# Altium PCB Motor_Board.PcbDoc
Units mil, origin at the board's own origin, x right, y up, seen from the top; angles counter-clockwise.
Board outline 5486 x 3957 mil, 2 copper layers (Top Layer, Bottom Layer); 121 components, 86 nets, 397 pads, 128 vias.
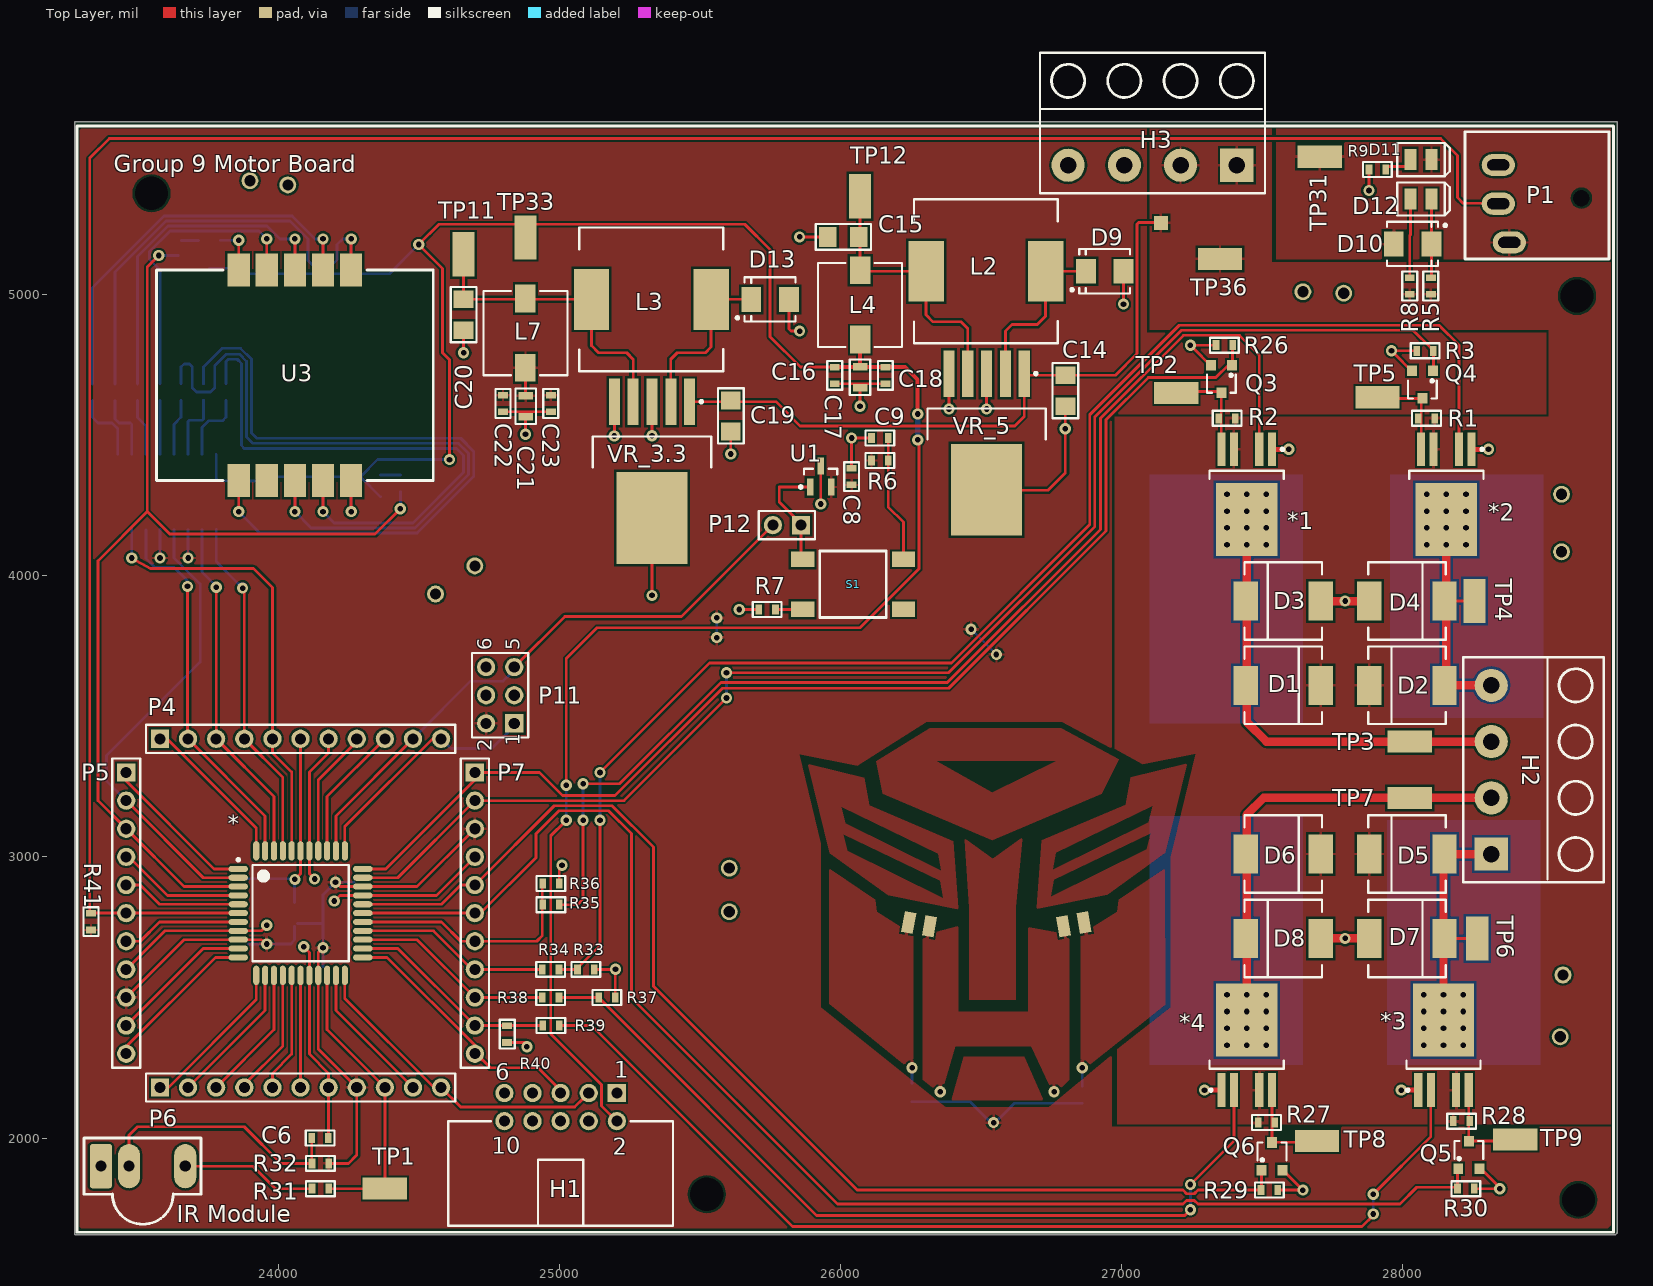
[diagram p0: Top Layer view]
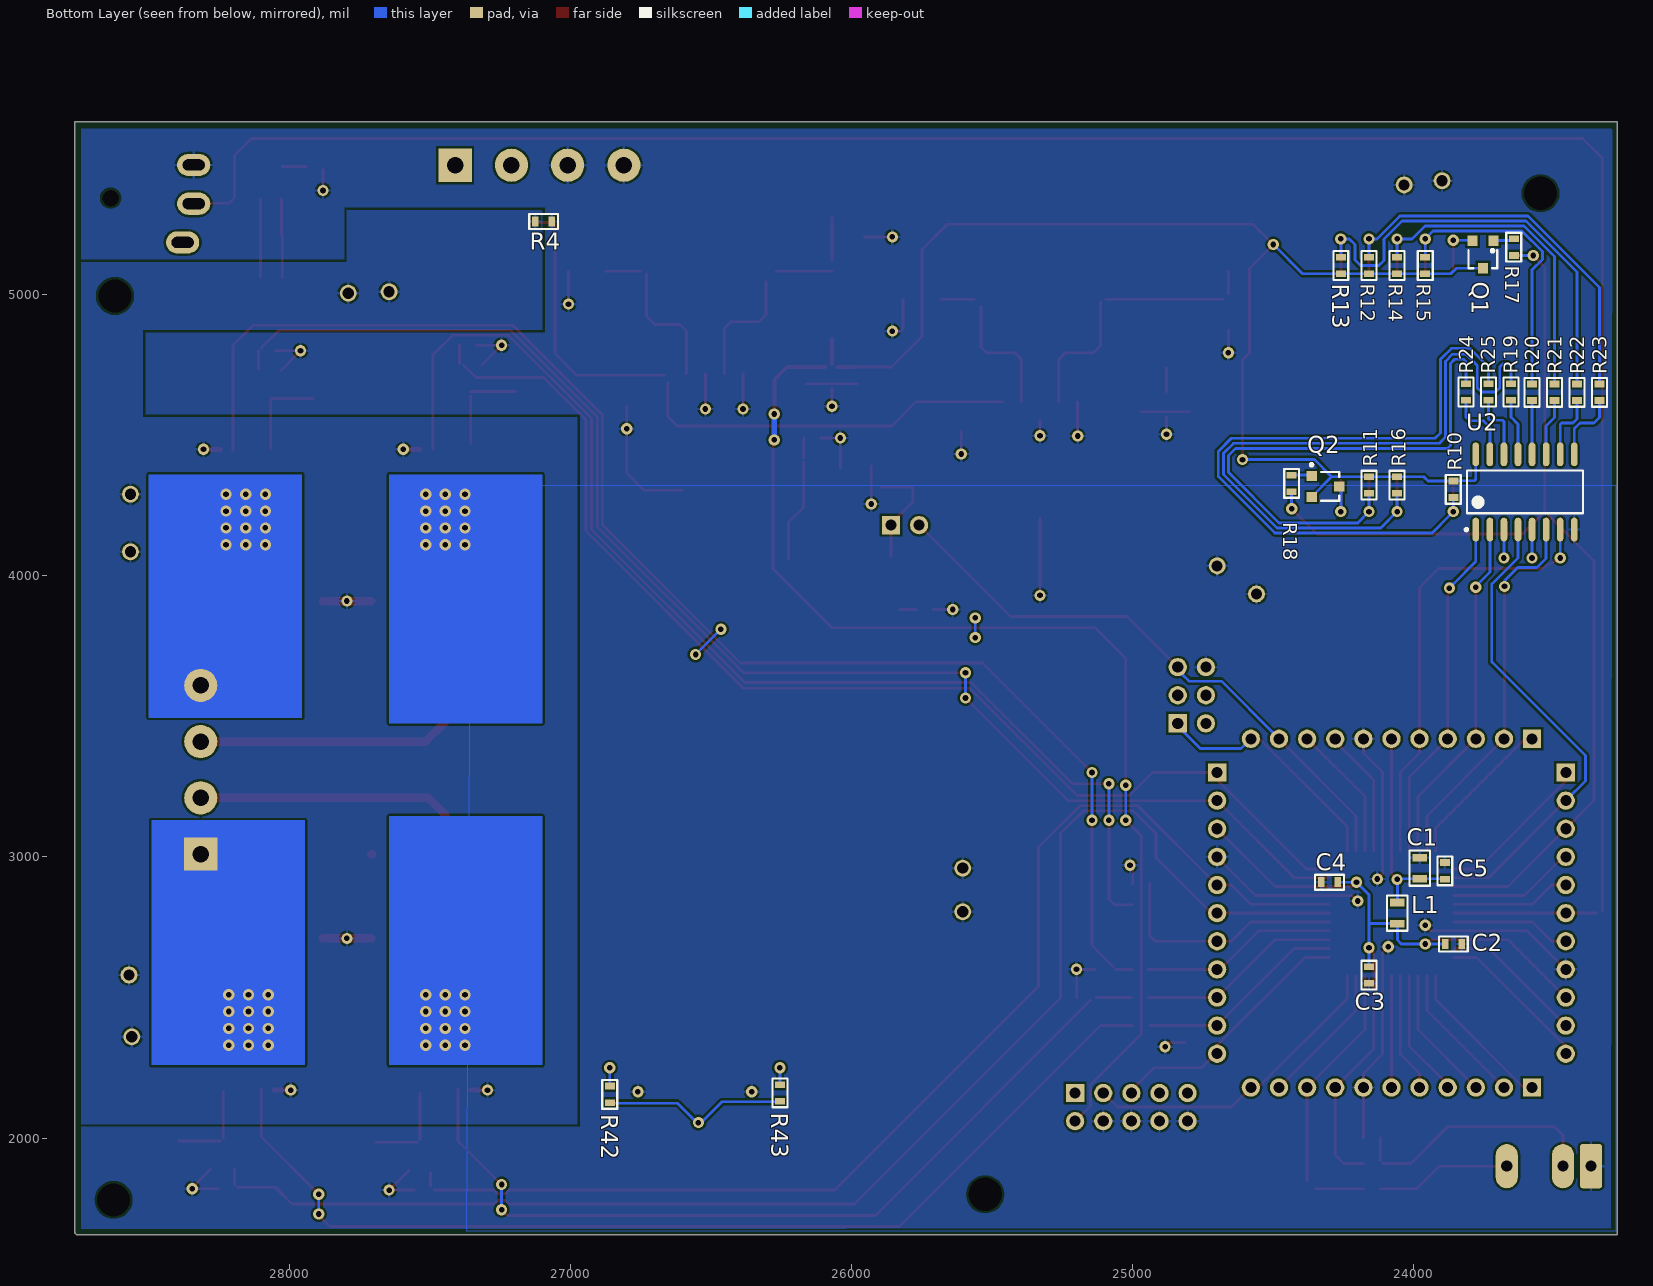
[diagram p1: Bottom Layer view, seen from below]

## Layer stack, top to bottom
Top Layer: signal copper 1.4
Dielectric: dielectric 12.6, FR-4, Dk 4.8
Bottom Layer: signal copper 1.4

## Board outline
23277,5614 23277,1657 28757,1657 28763,1663 28763,5614

## Design rules (kind name [scope] priority, off if disabled: settings)
Clearance Clearance_Polygon [InPolygon vs IsVia Or IsPad] p1 off: gap=23.62
Clearance [All] p2: gap=7.87
HoleSize [All] p1: absolutevalues=TRUE maxlimit=196.85 minlimit=19.68 maxpercent=80.000 minpercent=20.000
MinimumAnnularRing [All] p1: minimumring=10
MinimumSolderMaskSliver [All] p1: minsoldermaskwidth=3.94
NetAntennae [All] p1 off: netantennaetolerance=0
PasteMaskExpansion [All] p1 off: expansion=0
PolygonConnect [All] p1: connectstyle=Relief reliefconductorwidth=10 reliefentries=4 polygonreliefangle="90 Angle"
RoutingVias [All] p1: holewidth=27.56 width=47.24 viastyle="Through Hole" minholewidth=19.68 minwidth=39.37 maxholewidth=43.31 maxwidth=66.93
SMDNeckDown [All] p1: percent=60.000
SMDToCorner [All] p1: distance=393701
SilkToSilkClearance [All] p1 off: silktosilkclearance=10
SilkscreenOverComponentPads [All] p1 off: minsilkscreentomaskgap=10
SolderMaskExpansion [All] p1: expansion=5.91
Width [All] p1: maxlimit=196.85 minlimit=7.87 preferedwidth=7.87
22 further rules are at their usual default settings.

## Classes and differential pairs
component class MCU: * C1 C2 C3 C4 C5 C8 C9 L1 P4 P5 P6 P7 P11 P12 R6 R7 S1 U1
component class "Power supply": C14 C15 C16 C17 C18 C19 C20 C21 C22 C23 D9 D10 D11 D12 D13 L2 L3 L4 L7 R4 R5 R8 R9 TP11 TP12 TP31 TP33 TP36 VR_3.3 VR_5
component class Motor_Board: H1 H2 H3 P1 R41 R42 R43
component class IR: C6 "IR Module" R31 R32 TP1
component class Display: Q1 Q2 R10 R11 R12 R13 R14 R15 R16 R17 R18 R19 R20 R21 R22 R23 R24 R25 U2 U3
component class Motor_Driver: *1 *2 *3 *4 D1 D2 D3 D4 D5 D6 D7 D8 Q3 Q4 Q5 Q6 R1 R2 R3 R26 R27 R28 R29 R30 R33 R34 R35 R36 R37 R38 R39 R40 R?? TP2 TP3 TP4 TP5 TP6 TP7 TP8 TP9

## Components (designator, comment, footprint, x,y, rotation, side; value= is the part's Value field where it differs from the comment)
* "ATXMEGA16A4-AU" TQFP80P1200X1200X120-44N 24080,2800 r0 top
*1 "FDD8424H" TO114P990X239-5N 27445,4290 r270 top
*2 "FDD8424H" TO114P990X239-5N 28155,4290 r270 top
*3 "FDD8424H" TO114P990X239-5N 28145,2330 r90 top
*4 "FDD8424H" TO114P990X239-5N 27445,2330 r90 top
C1 "10uF" 0805 23980,2960 r90 bottom
C2 "100nF" 0603 23830,2690 r0 bottom
C3 "100nF" 0603 24160,2550 r90 bottom
C4 "100nF" 0603 24330,2910 r180 bottom
C5 "100nF" 0603 23890,2980 r270 bottom
C6 "4u7" 0603 24120,2000 r0 top
C8 "100nF" 0603 26040,4323 r90 top
C9 "100nF" 0603 26170,4490 r180 top
C14 "100uF 6V3" 1206 26800,4603 r90 top
C15 "100uF 6V3" 1206 25955,5205 r0 top
C16 "10uF" 0805 26069.02,4705.6 r90 top
C17 "1uF" 0603 25980,4683 r90 top
C18 "10nF" 0603 26160,4683 r90 top
C19 "100uF 6V3" 1206 25610,4513 r90 top
C20 "100uF 6V3" 1206 24660,4873 r90 top
C21 "10uF" 0805 24880,4603 r90 top
C22 "1uF" 0603 24800,4583 r90 top
C23 "10nF" 0603 24970,4583 r90 top
D1 "5A/40V" DIODE_SMC 27575,3610 r180 top
D2 "5A/40V" DIODE_SMC 28015,3610 r0 top
D3 "5A/40V" DIODE_SMC 27575,3910 r0 top
D4 "5A/40V" DIODE_SMC 28015,3910 r180 top
D5 "5A/40V" DIODE_SMC 28015,3010 r0 top
D6 "5A/40V" DIODE_SMC 27575,3010 r180 top
D7 "5A/40V" DIODE_SMC 28015,2710 r180 top
D8 "5A/40V" DIODE_SMC 27575,2710 r0 top
D9 "2A/40V" SMB_DIODE 26940,5083 r180 top
D10 "2A/40V" SMB_DIODE 28035,5180 r0 top
D11 "LED Green" DIODE_0805 28065,5480 r0 top
D12 "LED Red" Diode_0805 28065,5340 r0 top
D13 "2A/40V" SMB_DIODE 25750,4983 r180 top
H1 "Comms" 918510x323 25005,2060 r180 top
H2 "Twin Motor Connector" TMHDR4 28315,3010 r90 top
H3 "Twin Battery Connector" TMHDR4 27410,5460 r180 top
"IR Module" "TSOP1236" "TSOP1236 IR Receiver" 23470,1900 r180 top
L1 "IN_FERRITE CHIP 120 OHM 800mA 0805" 0805 24060,2800 r90 bottom
L2 "Inductor" DR124 26730,5083 r180 top
L3 "Inductor" DR124 25540,4983 r180 top
L4 "10uH" WE-PD 26070,4963 r270 top
L7 "10uH" WE-PD 24880,4863 r270 top
P1 "Header 3" "DC power jack" 28340,5520 r270 top
P4 "Header 11" HDR1X11 23580,3420 r0 top
P5 "Header 11" HDR1X11 23460,3300 r270 top
P6 "Header 11" HDR1X11 23580,2180 r0 top
P7 "Header 11" HDR1X11 24700,3300 r270 top
P11 "Header 3X2" HDR2X3 24840,3475 r90 top
P12 "Header 2" HDR1X2 25860,4180 r180 top
Q1 "ZXM61N02F" SOT-23 23755,5143 r0 bottom
Q2 "ZXM61P02F" SOT23 24315,4318 r270 bottom
Q3 "ZXM61N02F" SOT-23 27355,4700 r180 top
Q4 "ZXM61N02F" SOT-23 28070,4680 r180 top
Q5 "ZXM61N02F" SOT-23 28235,1940 r0 top
Q6 "ZXM61N02F" SOT-23 27535,1935 r0 top
R1 "10k" 0603 28055,4560 r0 top
R2 "10k" 0603 27405,4560 r180 top
R3 "10k" 0603 28050,4800 r0 top
R4 "0R0" 0603 27125,5260 r180 bottom
R5 "4R7" 0603 28100,5060 r270 top
R6 "10k" 0603 26170,4410 r180 top
R7 "330R" 0603 25710,3880 r0 top
R8 "100R" 0603 28025,5060 r270 top
R9 "2k2" 0603 27880,5445 r0 top
R10 "10k" 0603 23860,4278 r90 bottom
R11 "10k" 0603 24160,4293 r90 bottom
R12 "10k" 0603 24160,5133 r270 bottom
R13 "10k" 0603 24260,5133 r270 bottom
R14 "10k" 0603 24060,5133 r270 bottom
R15 "10k" 0603 23960,5133 r270 bottom
R16 "10k" 0603 24060,4293 r90 bottom
R17 "180R" 0603 23645,5198 r270 bottom
R18 "680R" 0603 24435,4358 r270 bottom
R19 "180R" 0603 23655,4683 r270 bottom
R20 "180R" 0603 23580,4682.06 r270 bottom
R21 "180R" 0603 23500,4682.06 r270 bottom
R22 "180R" 0603 23420,4682.06 r270 bottom
R23 "180R" 0603 23340,4682.06 r270 bottom
R24 "180R" 0603 23815,4683 r270 bottom
R25 "180R" 0603 23735,4683 r270 bottom
R26 "10k" 0603 27395,4820 r180 top
R27 "10k" 0603 27545,2055 r180 top
R28 "10k" 0603 28180,2060 r0 top
R29 "10k" 0603 27555,1815 r180 top
R30 "10k" 0603 28195,1820 r0 top
R31 "0R0" 0603 24180,1820 r180 top
R32 "100R" 0603 24180,1910 r180 top
R33 "10k" 0603 25065,2600 r0 top
R34 "100R" 0603 24940,2600 r0 top
R35 "100R" 0603 25000,2830 r180 top
R36 "10k" 0603 25000,2905 r180 top
R37 "10k" 0603 25140,2500 r0 top
R38 "100R" 0603 24940,2500 r0 top
R39 "100R" 0603 25000,2400 r180 top
R40 "10k" 0603 24815,2340 r90 top
R41 "10k" 0603 23335,2740 r90 top
R42 "150R" 0603 26860,2185 r270 bottom (schematic designator R41)
R43 "150R" 0603 26255,2190 r270 bottom (schematic designator R42)
S1 "FSM2JSMA" FSM2JSMA 26045,3970 r90 top
TP1 "TP" TEST_POINT_4X2MM#1 24380,1820 r0 top
TP2 "TP" TEST_POINT_4X2MM#1 27195,4650 r180 top
TP3 "TP" TEST_POINT_4X2MM#1 28025,3410 r0 top
TP4 "TP" TEST_POINT_4X2MM#1 28255,3910 r90 top
TP5 "TP" TEST_POINT_4X2MM#1 27910,4635 r180 top
TP6 "TP" TEST_POINT_4X2MM#1 28265,2710 r270 top
TP7 "TP" TEST_POINT_4X2MM#1 28025,3210 r180 top
TP8 "TP" TEST_POINT_4X2MM#1 27695,1990 r180 top
TP9 "TP" TEST_POINT_4X2MM#1 28400,1995 r180 top
TP11 "TP" TEST_POINT_4X2MM#1 24880,5203 r270 top
TP12 "TP" TEST_POINT_4X2MM#1 26070,5350 r90 top
TP31 "TP" TEST_POINT_4X2MM#1 27705,5490 r0 top
TP33 "TP" TEST_POINT_4X2MM#1 24660,5143 r90 top
TP36 "TP" TEST_POINT_4X2MM#2 27330,5125 r90 top
U1 "MCP130T-300I/TT" SOT-23-TT3_N 25930,4353 r90 top
U2 "SN74LS47" SOP127P780X200-16N 23605,4298 r90 bottom
U3 "HDSM-541C" HDSM-541C 24060,4713 r0 top
VR_3.3 "TL2575-33IKTTR" TO170P1524X483-6N 25330,4373 r270 top
VR_5 "TL2575-05IKTTR" TO170P1524X483-6N 26520,4473 r270 top

## Footprints (in the part's own frame and the unit in brackets; to place one, negate y for a bottom-side part, rotate by r counter-clockwise, add the part's x,y. Pads: shape width x height; smd on the part's side, far side on the other; paste and mask are expansions set on the pad)
0603 [mm] "Non polarized 0603 footprint"
  rect 0.6x0.9 smd: 1(0,0) 2(1.5,0)
  silkscreen extent -0.55,-0.67 2.05,0.67
0805 [mm]
  rect 0.7x1.3 smd: 1(-0.95,-0.025) 2(0.95,-0.025)
  silkscreen extent -1.6,-0.95 1.6,0.9
1206 [mm] "Non-polarized 1206 footprint"
  rect 1.6x1.8 smd: 1(0,0) 2(2.8,0)
  silkscreen extent -1.09,-1.17 3.91,1.16
918510x323 [mm] "Connector; IDC, Low Profile Male Header, Thru-Hole; 10 Position; Right Angle; Pitch 2.54 mm; Body 20.32 x 8.9 x 9.2 mm (LxWxH)"
  rect 1.65x1.65 hole 1: 1(-5.08,-2.54)
  round 1.65 hole 1: 2(-5.08,0) 3(-2.54,-2.54) 4(-2.54,0) 5(0,-2.54) 6(0,0) 7(2.54,-2.54) 8(2.54,0) 9(5.08,-2.54) 10(5.08,0)
  silkscreen extent -10.16,0 10.16,9.45, body extent -10.26,-0.1 10.26,9.55, height 9.2
"DC power jack" [mm] "almost certianly wrong"
  oval 2x3 hole 1 slot 2 at 90 deg: 1(1.5,0) 2(5,0) 3(8.5,1)
  round 0 hole 1.5: ""(4.5,7.5)
  silkscreen extent -1.5,-3 10,10
DIODE_0805 [mm] "0805 SMD diode"
  rect 1.05x1.9 smd: 1(-0.95,0) 2(0.95,0)
  silkscreen extent -2.15,-1.5 2.6,1.5
Diode_0805 [mm] "0805 SMD diode"
  rect 1.05x1.9 smd: 1(-0.95,0) 2(0.95,0)
  silkscreen extent -2.15,-1.5 2.6,1.5
DIODE_SMC [mm] "Magnetic-Core Inductor with Winding Polarity Marking; 2 Leads"
  rect 2.2x3.5 smd: 1(3.4,0) 2(-3.4,0)
  silkscreen extent -3.5,-3.5 3.5,3.5
DR124 [mm] "Coiltronics DR124 Series Inductor"
  rect 3.2x5.5 smd: 1(0,0) 2(10.8,0)
  silkscreen extent -1.1,-6.5 11.9,6.5
FSM2JSMA [mm] "DPST SMD Switch Footprint"
  rect 1.4x2.1 smd paste-2.286: 1(2.248,4.55) 2(2.248,-4.55) 3(-2.248,-4.55) 4(-2.248,4.55)
  silkscreen extent -3,-3 3,3, body extent -2.97,-5.03 3.03,4.97, height 4.39
HDR1X2 [mil] "Connector; Header; 2 Position"
  rect 65x65 hole 39.37: 1(0,0)
  round 65 hole 39.37: 2(100,0)
  silkscreen extent -50,-50 150,50
HDR1X11 [mil] "Connector; Header; 11 Position"
  rect 65x65 hole 39.37: 1(0,0)
  round 65 hole 39.37: 2(100,0) 3(200,0) 4(300,0) 5(400,0) 6(500,0) 7(600,0) 8(700,0) 9(800,0) 10(900,0) 11(1000,0)
  silkscreen extent -50,-50 1050,50
HDR2X3 [mil] "Connector; Header; 3x2 Position"
  rect 65x65 hole 39.37: 1(0,0)
  round 65 hole 39.37: 2(0,100) 3(100,0) 4(100,100) 5(200,0) 6(200,100)
  silkscreen extent -50,-50 250,150
HDSM-541C [mm] "2 char 7 segment smt led display"
  rect 2x3 smd: 1(-5.08,-9.5) 2(-2.54,-9.5) 3(0,-9.5) 4(2.54,-9.5) 5(5.08,-9.5) 6(5.08,9.5) 7(2.54,9.5) 8(0,9.5) 9(-2.54,9.5) 10(-5.08,9.5)
  silkscreen extent -12.5,-9.5 12.5,9.5, body extent -12.5,-9.5 12.5,9.5, height 3.75
SMB_DIODE [mm] "Molded Diode, 2-Leads, Body 4.6x3.9mm, IPC Medium Density"
  rect 1.8x2.25 smd: 1(-1.7,0) 2(1.7,0)
  silkscreen extent -2.3,-2 3.07,2
SOP127P780X200-16N [mm] "SOP, 16-Leads, Body 10.5x5.6mm (max), Pitch 1.27mm, IPC Medium Density"
  oval 2.15x0.6 smd: 1(-3.4,4.445) 2(-3.4,3.175) 3(-3.4,1.905) 4(-3.4,0.635) 5(-3.4,-0.635) 6(-3.4,-1.905) 7(-3.4,-3.175) 8(-3.4,-4.445) 9(3.4,-4.445) 10(3.4,-3.175) 11(3.4,-1.905) 12(3.4,-0.635) 13(3.4,0.635) 14(3.4,1.905) 15(3.4,3.175) 16(3.4,4.445)
  silkscreen extent -3.52,-5.25 1.92,5.42, body extent -2.8,-5.25 2.8,5.25, height 2
SOT23 [mm] "SOT-23; 3 Leads; Body 3.0 x 2.6 mm, inc. leads (LxW max)"
  rect 0.9x0.95 smd: 1(-0.95,-1.25) 2(0.95,-1.25) 3(0,1.25)
  silkscreen extent -2.07,-1.38 1.3,1.25
SOT-23 [mm] "SOT-23; 3 Leads; Body 3.0 x 2.6 mm, inc. leads (LxW max)"
  rect 0.9x0.95 smd: 1(-0.95,-1.25) 2(0.95,-1.25) 3(0,1.25)
  silkscreen extent -1.3,-0.45 1.3,1.25
SOT-23-TT3_N [mm] "SOT23, 3-Leads, Body 2.9x1.3mm, Pitch 0.95mm, Lead Span 2.4mm, IPC Medium Density"
  rect 1.5x0.6 smd: 1(-0.95,0.95) 2(-0.95,-0.95) 3(0.95,0)
  silkscreen extent -1.07,-1.5 0.7,1.92, body extent -0.7,-1.5 0.7,1.5, height 1.12
TEST_POINT_4X2MM#1 [mm] "Test Point Pad"
  rect 4x2 smd: 1(0,0)
TEST_POINT_4X2MM#2 [mm] "Test Point Pad"
  rect 2x4 smd: 1(0.051,-0.508)
TMHDR4 [mm] "5.08mm Pluggable Terminal Header"
  rect 3x3 hole 1.5: 1(0,0)
  round 3 hole 1.5: 2(5.08,0) 3(10.16,0) 4(15.24,0)
  silkscreen extent -2.54,-10.16 17.78,2.54
TO114P990X239-5N [mm] "D-PAK, 5-Pads, Body 6.2x6.7mm (max), IPC Medium Density"
  rect 3.05x0.737 smd: 1(-4.05,2.28) 2(-4.05,1.14) 4(-4.05,-1.14) 5(-4.05,-2.28)
  rect 6.6x5.55 smd: 6(2.3,0)
  silkscreen extent -4.17,-3.35 -1.4,3.36, body extent -2.4,-3.37 3.82,3.37, height 2.39
TO170P1524X483-6N [mm] "D2-PAK, 6-Pads, Body 9.6x10.7mm (max), IPC Medium Density"
  rect 4.2x1 smd: 1(-6.25,3.4) 2(-6.25,1.7) 3(-6.25,0) 4(-6.25,-1.7) 5(-6.25,-3.4)
  rect 8.3x6.4 smd: 6(4.25,0)
  silkscreen extent -6.37,-5.35 -0.3,5.35, body extent -3.1,-5.33 6.55,5.33, height 4.83
TQFP80P1200X1200X120-44N [mm] "TQFP, 44-Leads, Body 12.3x12.3mm (max), Pitch 0.80mm, IPC Medium Density"
  oval 1.75x0.55 smd: 1(-5.625,4) 2(-5.625,3.2) 3(-5.625,2.4) 4(-5.625,1.6) 5(-5.625,0.8) 6(-5.625,0) 7(-5.625,-0.8) 8(-5.625,-1.6) 9(-5.625,-2.4) 10(-5.625,-3.2) 11(-5.625,-4) 23(5.625,-4) 24(5.625,-3.2) 25(5.625,-2.4) 26(5.625,-1.6) 27(5.625,-0.8) 28(5.625,0) 29(5.625,0.8) 30(5.625,1.6) 31(5.625,2.4) 32(5.625,3.2) 33(5.625,4)
  oval 0.55x1.75 smd: 12(-4,-5.625) 13(-3.2,-5.625) 14(-2.4,-5.625) 15(-1.6,-5.625) 16(-0.8,-5.625) 17(0,-5.625) 18(0.8,-5.625) 19(1.6,-5.625) 20(2.4,-5.625) 21(3.2,-5.625) 22(4,-5.625) 34(4,5.625) 35(3.2,5.625) 36(2.4,5.625) 37(1.6,5.625) 38(0.8,5.625) 39(0,5.625) 40(-0.8,5.625) 41(-1.6,5.625) 42(-2.4,5.625) 43(-3.2,5.625) 44(-4,5.625)
  silkscreen extent -5.75,-4.35 4.35,4.95, body extent -5,-5 5,5, height 1.2
"TSOP1236 IR Receiver" [mm] "Vishay IR Receiver Module"
  rrect25% 2x4 hole 1: 1(2.54,0)
  oval 2x4 hole 1: 2(0,0) 3(-5.08,0)
  silkscreen extent -6.5,-2.54 4.06,5.25
WE-PD [mm] "Inductor 7.6x7.6mm"
  rect 2.5x1.85 smd: 1(-3.125,0) 2(3.125,0)
  silkscreen extent -3.8,-3.8 3.8,3.8

## Part data
C1 C16 C21: library part "CP_10uF 0805", "CAP 10uF 10% 10V X5R 0805"
C2 C3 C4 C5 C8 C9: library part "CP_100nF 0603", "CAP CER .10UF 50V X5R 0603"
C6: library part "CP_4u7 0603", "CAP CER 4.7UF 10V X5R 0603"
C14 C15 C19 C20: library part "CP_CER 100uF_1206_6V3", "100uF 6.3V 1206 multi-layer ceramic capacitor"
C17 C22: library part CP_1uF_50V_0603, "CAP CER 1.0UF 50V X7R 0603"
C18 C23: library part "CP_10nF 0603", "CAP CER 10000PF 100V X7R 0603"
D1 D2 D3 D4 D5 D6 D7 D8: library part DS_SSC54-E3/57T, "DIODE SCHOTTKY 5A 40V SMC"
D9 D10 D13: library part DS_SS230TP, "Schottky Diode - 2A/30V"
D11: library part "DL_LED Green 0805", "Green LED 0805"
D12: library part "DL_LED Red 0805", "Red LED 0805"
H1: library part "Header 10", "Header, IDC 10-Pin"
H2 H3: library part "AVR ISP Header 4", "5.08mm Pluggable Terminal Header"
L1: "FERRITE CHIP 120 OHM 800mA 0805"
L2 L3: library part "IN_33u 2A SMT", "INDUCTOR POWER SHIELD 33UH 2.6A SMD"
L4 L7: library part "IN_10uH 2A SMT", "INDUCTOR POWER 10UH 2.0A SMD"
P1: "Header, 3-Pin"
P4 P5 P6 P7: "Header, 11-Pin"
P11: "Header, 3-Pin, Dual row"
P12: "Header, 2-Pin"
Q1 Q3 Q4 Q5 Q6: library part TF_ZXM61N02F, "20V N-channel enhancement mode MOSFET"
Q2: library part TF_ZXM61P02F, "20V P-channel enhancement mode MOSFET"
R1 R2 R3 R6 R10 R11 R12 R13 R14 R15 R16 R26 R27 R28 R29 R30 R33 R36 R37 R40 R41: library part "RS_10k 0603", "RES 10.0K OHM 1/10W 1% 0603 SMD"
R4 R31: library part "RS_0R0 0603", "RES 0.0 OHM 1/10W 5% 0603 SMD"
R5: library part RS_4R7_0603, "RES 4.7R 1/10W 5% 0603 SMD"
R7: library part "RS_330R 0603", "RES 330 OHM 1/10W 1% 0603 SMD"
R8 R32 R34 R35 R38 R39: library part "RS_100R 0603", "RES 100 OHM 1/10W 1% 0603 SMD"
R9: library part "RS_2k2 0603", "RES 2.2K OHM 1/10W 5% 0603 SMD"
R17 R19 R20 R21 R22 R23 R24 R25: library part "RS_180R 0603", "RES 180OHM 1/10W 1% 0603 SMD"
R18: library part "RS_680R 0603", "RES 680 OHM 1/10W 1% 0603 SMD"
R42 R43: library part "RS_150R 0603", "RES 150 OHM 1/10W 1% 0603 SMD"
S1: library part SW_FSM2JSMA, "DPST SMD Switch"
TP1 TP2 TP3 TP4 TP5 TP6 TP7 TP8 TP9 TP11 TP12 TP31 TP33 TP36: library part TP_TESTPOINT, "Test-Point"
U1: "Microcontroller Supervisory Circuit with Open Drain Output, 3-Pin SOT-23, Industrial Temperature, Tape and Reel"
U3: "2 character 7 segment display"

## Free pads (board coordinates)
  round 60 hole 39.87: 0(23900,5405) 1(24035,5390) 2(27645,5010) 3(27790,5005) 4(28570,2580) 5(28560,2360) 6(25605,2960) 7(25605,2805) 8(28565,4290) 9(28565,4085) 10(24560,3935) 11(24700,4035)
  round 0 hole 118.11: 0(28620,4995) 1(23550,5360) 2(25525,1800) 3(28625,1780)
  rect 41.34x74.8 smd rot 170: 1(26243.17,2766.49) 2(26316.83,2753.51)
  rect 41.34x74.8 smd rot 10: 1(26866.83,2766.49) 2(26793.17,2753.51)
  rect 50x50 smd: 3(27140,5255)

## Via types
v1: diameter 40, hole 20, Top Layer to Bottom Layer, 128 vias

## Nets (pads, with @x,y where several pads share a name; then routed paths per layer and width w, separated by ;. In a path a pad name is that pad's centre, name@x,y a point inside that pad or via, vN(x,y) a via of type N, cw(c..) or ccw(c..) an arc to the next point about the centre after c; other vN are vias at no path point)
AVCC: *.39 C1.1 C5.2 L1.2 P4.6 | length 761.6
  Top Layer w10: v1(24060.08,2920) 24080,2939.92 *.39 P4.6
  Bottom Layer w10: C5.2@23890,2922.6 23989.02,2922.6 24057.48,2922.6 24059.02,2921.06 L1.2
GND: "IR Module.1" *.8 *.18 *.30 *.38 C1.2 C2.1 C3.1 C4.1 C5.1 C6.2 C8.2 C9.2 C14.1 C15.1 C16.1 C17.1 C18.1 C19.1 C20.1 C21.1 C22.1 C23.1 D9.1 D13.1 H1.4 H1.6 H1.8 H1.10 H3.3 H3.4 P1.1 P4.7 P5.8 P6.7 P7.4 P11.6 pad.0@23900,5405 pad.1@24035,5390 pad.2@26316.83,2753.51 pad.2@26793.17,2753.51 pad.6 pad.7 pad.10 pad.11 Q3.2 Q4.2 Q5.2 Q6.2 R3.1 R4.2 R7.1 R9.1 R26.2 R29.1 R30.2 R33.2 R36.1 R37.2 R40.1 U1.3 U2.8 VR_3.3.3 VR_3.3.5 VR_3.3.6 VR_5.3 VR_5.5 VR_5.6 | length 5950.1
  Top Layer w10: P5.8 23597.01,2737.01 *.8 23940.08,2737.01 v1(23960,2756.93) ; v1(24091.57,2680) 24111.5,2660.08 *.18 24111.5,2298.5 24180,2230 P6.7 ; v1(24130,2921.42) 24111.5,2939.92 *.38 24111.5,3301.5 24180,3370 P4.7 ; C6.2 P6.7@24179.06,2179.06 ; v1(24200,2843.07) 24219.92,2862.99 *.30 24562.99,2862.99 P7.4 ; v1(24660,4793) C20.1 ; C22.1 C23.1 ; R40.1 v1@24880,2340 ; v1(24880,4503) C21.1@24880,4564.61 ; R36.1@25000,2904.06 25000,2970 v1(25010,2970) ; R33.2@25135,2600 v1@25205,2600 ; v1(25196.14,4496.86) VR_3.3.5 ; R37.2 v1@25199.06,2600 ; v1(25330,3930) VR_3.3.6 ; v1@25330,4513 VR_3.3.3@25330,4553 ; v1(25610,4433) C19.1 ; v1@25650,3880 R7.1 ; D13.1 25816.93,4878.07 25825,4870 v1@25850,4870 ; v1(25855,5205) C15.1 ; U1.3 25930,4253 25930,4260 v1@25935,4255 ; C17.1 C18.1 ; C8.2 v1@26040,4480 ; v1(26040,4490) C9.2@26110,4490 ; v1(26070,4603) C16.1 ; v1(26386.14,4593) VR_5.5 ; v1(26520,4593) VR_5.3 ; VR_5.6@26603.23,4303.91 26739.06,4303.91 26800,4364.85 v1(26800,4523) C14.1 ; v1(27006.93,4966.07) D9.1 ; v1@27255,4820 R26.2@27335,4820 ; v1@27256.81,4810 27256.81,4808.19 Q3.2@27315,4750 ; R29.1 v1@27635,1815 ; Q6.2@27575,1885 27633.19,1826.81 v1@27633.19,1825 ; v1(27880,5370) R9.1 ; v1@27970,4800 R3.1 ; v1@27971.81,4790 27971.81,4788.19 Q4.2@28030,4730 ; R30.2 v1@28335,1820 ; Q5.2@28281.26,1887.83 v1@28342.05,1827.05
  other v1: 27645,1815 28345,1820 26355,2165 26760,2165 24885,2325 25200,2600 25640,3880 25930,4255 25330,4498 27960,4800 27245,4820 25855,4870
MOTOR_GND: *1.1 *2.1 *3.1 *4.1 D3.1 D4.1 D7.1 D8.1 pad.2@27645,5010 pad.3@27790,5005 pad.4 pad.5 pad.8 pad.9 R4.1 | length 587.5
  Top Layer w17: v1(27295,2170.55) *4.1 ; *1.1 v1(27595,4449.45) ; v1(27995,2170.55) *3.1 ; *2.1 v1(28305,4449.45)
  Top Layer w30: D8.1 D7.1 ; D3.1 D4.1
  Bottom Layer w10: R4.1@27125,5258 R4.1
  other v1: 27795,2710 27795,3910
Net*1_2: *1.2 R35.1 | length 4164.3
  Top Layer w10: R35.1 25065,2830 25085,2850 v1(25085,3130) v1@25085,3135 ; v1(25085,3260) 25215,3260 25575,3620 26380,3620 26925,4165 26925,4560 27220,4855 27420,4855 27490,4785 *1.2@27490,4450
  Bottom Layer w10: v1@25085,3135 v1(25085,3260)
Net*1_5: *1.5 Q3.3 R2.2 TP2.1 | length 329.8
  Top Layer w10: TP2.1@27195.79,4655 Q3.3@27355,4655 ; *1.5@27354.88,4469.45 Q3.3@27354.88,4640
Net*1_6: *1.6 D1.1 D3.2 H2.3 TP3.1 | length 1616.8
  Top Layer w30: 27445,3480 *1.6 ; 27446.14,3478.86 27515,3410 TP3.1 H2.3
  other v1: 27375,4110 27445,4110 27515,4110 27375,4170 27445,4170 27515,4170 27375,4230 27445,4230 27515,4230 27375,4290 27445,4290 27515,4290
Net*2_2: *2.2 R33.1 R34.2 | length 5128.8
  Top Layer w10: R34.2 R33.1@25060,2600 ; R33.1@25070,2610 25145,2685 v1(25145,3130) ; v1(25145,3300) 25535,3690 26394.72,3690 26887.13,4182.4 26887.13,4572.68 27205.19,4890.75 28129.25,4890.75 28200,4820 *2.2@28200,4445
  Bottom Layer w10: v1(25145,3130) v1(25145,3300)
Net*2_5: *2.5 Q4.3 R1.1 TP5.1 | length 317.7
  Top Layer w10: TP5.1@27915.79,4630.79 Q4.3@28065,4630.79 ; *2.5@28065.65,4451.69 Q4.3@28065.65,4620.2
Net*2_6: *2.6 D2.1 D4.2 H2.4 TP4.1 | length 742
  Top Layer w10: D4.2@28182.87,3910 TP4.1
  Top Layer w30: D2.1@28155,3660 *2.6 ; D2.1@28174.61,3610 H2.4@28305,3610
  other v1: 28085,4110 28155,4110 28225,4110 28085,4170 28155,4170 28225,4170 28085,4230 28155,4230 28225,4230 28085,4290 28155,4290 28225,4290
Net*3_2: *3.2 R39.1 | length 3752.6
  Top Layer w10: R39.1 25115,2400 25830,1685 27855,1685 27895,1725 v1@27900,1725 ; v1(27895,1800) 28100,2005 *3.2@28100,2175
  Bottom Layer w10: v1@27895,1720 v1(27895,1730) v1(27895,1800)
Net*3_5: *3.5 Q5.3 R28.2 TP9.1 | length 314.1
  Top Layer w10: Q5.3@28235,2000 *3.5@28235,2165.67 ; Q5.3@28245,1990 TP9.1@28393.43,1990
Net*3_6: *3.6 D5.1 D7.2 H2.1 TP6.1 | length 749.4
  Top Layer w10: D7.2@28175,2710 TP6.1@28255,2710
  Top Layer w30: *3.6 D5.1@28145,2970 ; D5.1@28185,3010 H2.1@28305,3010
  other v1: 28075,2330 28145,2330 28215,2330 28075,2390 28145,2390 28215,2390 28075,2450 28145,2450 28215,2450 28075,2510 28145,2510 28215,2510
Net*4_2: *4.2 R37.1 R38.2 | length 3069.4
  Top Layer w10: R38.2@25005,2500 R37.1@25130,2500 ; R37.1@25150,2490 25915,1725 27225,1725 v1(27245,1745) ; v1(27245,1835) 27400,1990 *4.2@27400,2175
  Bottom Layer w10: v1@27245,1730 v1(27245,1745) v1(27245,1835) v1@27245,1850
Net*4_5: *4.5 Q6.3 R27.1 TP8.1 | length 314.1
  Top Layer w10: Q6.3@27535,1995 *4.5@27535,2160.67 ; Q6.3@27545,1985 TP8.1@27693.43,1985
Net*4_6: *4.6 D6.1 D8.2 H2.2 TP7.1 | length 1624.9
  Top Layer w10: *4.6@27445,2420 *4.6
  Top Layer w30: *4.6 27445,3145 27445,3150 27505,3210 TP7.1 H2.2
  other v1: 27375,2330 27445,2330 27515,2330 27375,2390 27445,2390 27515,2390 27375,2450 27445,2450 27515,2450 27375,2510 27445,2510 27515,2510
NetC6_1: "IR Module.2" C6.1 R32.2 | length 896.3
  Top Layer w10: 23470,1900 23470,2010 23500,2040 23880,2040 24010,1910 R32.2@24110,1910 ; R32.2@24120,1920 C6.1
NetC15_2: C15.2 L2.2 L4.1 TP12.1 VR_5.4 | length 796.6
  Top Layer w10: L4.1@26070,5083.24 L2.2@26267.76,5083.24 ; L4.1@26070,5121.58 TP12.1@26070,5273 ; L2.2@26304.57,5046.43 26304.57,4928.43 26330,4903 26430,4903 26453.07,4879.93 VR_5.4
NetC20_2: C20.2 L3.2 L7.1 TP33.1 VR_3.3.4 | length 966.9
  Top Layer w10: C20.2@24660,5004 TP33.1@24660,5083 ; C20.2@24680.76,4983.24 L3.2@25094.76,4983.24 ; L3.2@25114.8,4973 25114.8,4818.2 25140,4793 25240,4793 25263.07,4769.93 VR_3.3.4
NetD9_2: D9.2 L2.1 VR_5.2 | length 589
  Top Layer w10: VR_5.2 26586.93,4869.93 26610,4893 26700,4893 26730,4923 L2.1@26730,5073 ; L2.1@26750,5083 D9.2
NetD10_2: D10.2 D12.2 R5.1 | length 277.6
  Top Layer w10: R5.1@28102.4,5062.4 D12.2
NetD11_1: D11.1 R9.2 | length 85
  Top Layer w10: R9.2@27940,5455 D11.1@28025,5455
NetD12_1: D12.1 R8.1 | length 281.1
  Top Layer w10: R8.1 28025,5209.8 28027.6,5212.4 D12.1
NetD13_2: D13.2 L3.1 VR_3.3.2 | length 574.8
  Top Layer w10: VR_3.3.2 25396.93,4769.93 25420,4793 25520,4793 25540,4813 L3.1@25540,4958 ; L3.1@25565,4983 D13.2
NetD14_1: pad.1@26866.83,2766.49 R42.1 | length 65
  Bottom Layer w10: R42.1 v1(26860,2250)
NetD15_1: pad.1@26243.17,2766.49 R43.1 | length 55
  Bottom Layer w10: R43.1@26255,2195 v1(26255,2250)
"NetIR Module_3": "IR Module.3" R31.2 | length 483.1
  Top Layer w10: 23670,1900 23910,1900 23990,1820 R31.2@24120,1820
NetQ1_1: Q1.1 R17.1 | length 61.8
  Bottom Layer w10: R17.1@23655.79,5192.21 Q1.1
NetQ1_2: Q1.2 U3.10 | length 176
  Top Layer w10: U3.10 v1@23860,5198
  Bottom Layer w10: Q1.2@23795,5193 v1(23860,5193)
NetQ2_1: Q2.1 R18.1 | length 70.8
  Bottom Layer w10: Q2.1@24364.21,4358 R18.1
NetQ2_3: Q2.3 U3.5 | length 195.2
  Top Layer w10: v1(24260,4228) U3.5
  Bottom Layer w10: v1(24260,4228) Q2.3@24260,4312.21
NetR7_2: R7.2 S1.3 S1.4 | length 60.9
  Top Layer w10: R7.2 S1.4@25830,3880
NetR10_1: R10.1 R25.1 U3.1 | length 2508.3
  Top Layer w10: v1(23860,4228) U3.1
  Bottom Layer w10: R25.1 23735,4743 23800.75,4808.75 23866.93,4808.75 23905.75,4769.93 23905.75,4508 23925,4488.75 24649.81,4488.75 24695.75,4442.81 24695.75,4353.19 24494.81,4152.25 23934.75,4152.25 23875,4212 ; v1@23860,4244 R10.1@23860,4270
NetR11_1: R11.1 R24.1 U3.4 | length 2067.3
  Top Layer w10: v1(24160,4228) U3.4
  Bottom Layer w10: R24.1 23815,4761.97 23823.15,4770.13 23855,4770.13 23870,4755.13 23870,4463 23880,4453 24635,4453 24660,4428 24660,4368 24480,4188 24200,4188 v1(24160,4228) R11.1
NetR12_1: R12.1 R23.1 U3.7 | length 1478.3
  Top Layer w10: U3.7 v1(24160,5198)
  Bottom Layer w10: R23.1 23340,5025.32 23594.17,5279.5 24050.27,5279.5 24131.77,5198 v1(24160,5198) R12.1
NetR13_1: R13.1 R22.1 U3.6 | length 1671.3
  Top Layer w10: U3.6 v1(24260,5198)
  Bottom Layer w10: R22.1 23420,5080.05 23601.58,5261.62 24042.87,5261.62 24106.49,5198 24106.49,5121.51 24125,5103 24190,5103 24210,5123 24210,5178 24230,5198 v1(24260,5198) R13.1
NetR14_1: R14.1 R21.1 U3.8 | length 1252.8
  Top Layer w10: U3.8 v1(24060,5198)
  Bottom Layer w10: R21.1 23500,5134.77 23608.98,5243.75 23960.74,5243.75 24006.49,5198 v1(24060,5198) R14.1
NetR15_1: R15.1 R20.1 U3.9 | length 1120.6
  Top Layer w10: U3.9 v1(23960,5198)
  Bottom Layer w10: R20.1 23580,5088.4 23543.07,5125.33 23543.07,5152.56 23616.38,5225.87 23932.13,5225.87 v1(23960,5198) R15.1
NetR16_1: R16.1 R19.1 U3.3 | length 2550.2
  Top Layer w10: v1(24060,4228) U3.3
  Bottom Layer w10: R19.1 23655,4743 23665,4753 23685,4753 23695,4743 23695,4668 23710,4653 23760,4653 23775,4668 23775,4747.25 23815.75,4788 23862.4,4788 23887.87,4762.53 23887.87,4493 23910,4470.87 24642.4,4470.87 24677.87,4435.4 24677.87,4360.6 24487.4,4170.13 24117.87,4170.13 v1(24060,4228) R16.1
NetR19_2: R19.2 U2.13 | length 202.4
  Bottom Layer w10: U2.13 23630,4538.94 23655,4563.94 R19.2
NetR20_2: R20.2 U2.12 | length 191.1
  Bottom Layer w10: U2.12 R20.2
NetR21_2: R21.2 U2.11 | length 203.6
  Bottom Layer w10: R21.2 23500,4563 23530,4533 U2.11
NetR22_2: R22.2 U2.10 | length 239.4
  Bottom Layer w10: R22.2 23420,4558 23435,4543 23475,4543 23480,4538 U2.10
NetR23_2: R23.2 U2.9 | length 257.7
  Bottom Layer w10: R23.2 23340,4563 23360,4543 23409.72,4543 23427.6,4525.13 23427.87,4525.13 23430,4523 U2.9
NetR24_2: R24.2 U2.15 | length 255.9
  Bottom Layer w10: U2.15 23730,4528 ; 23730.14,4527.86 23753.15,4550.87 23801.93,4550.87 23815,4563.94 R24.2
NetR25_2: R25.2 U2.14 | length 241.2
  Bottom Layer w10: U2.14 23680,4548 23685.14,4553.14 23730.14,4553.14 23735,4558 R25.2
PA0: *.40 P4.5 U2.7 | length 1603.7
  Top Layer w10: v1(23480,4063) 23547.6,4025.4 23912.59,4025.4 23980,3957.99 P4.5 23980,3370 24048.5,3301.5 *.40
  Bottom Layer w10: v1(23480,4063) U2.7
PA1: *.41 P4.4 U2.1 | length 1240.6
  Top Layer w10: v1@23880,3942 P4.4 24017.01,3282.99 *.41
  Bottom Layer w10: U2.1 23780,4051 23860,3971 23882,3971 v1@23882,3956
  other v1: 23874,3956
PA2: *.42 P4.3 U2.2 | length 1221.2
  Top Layer w10: P4.3 23985.51,3214.49 *.42 ; P4.3@23780,3437 v1(23780,3959)
  Bottom Layer w10: U2.2 23730,4013 v1@23775.5,3967.5
PA3: *.43 P4.2 U2.6 | length 1318.1
  Top Layer w10: P4.2@23678,3437 v1(23678,3962) ; P4.2 23954.02,3145.98 *.43
  Bottom Layer w10: U2.6@23530,4163 23530,4061.86 23562.6,4029.26 23631,4029.26 23677.26,3983
PA4: *.44 P4.1 | length 529.9
  Top Layer w10: P4.1@23605.51,3420 23922.52,3102.99 *.44
PA5: *.1 P5.1 | length 558
  Top Layer w10: P5.1 23460,3270 23772.52,2957.48 *.1
PA6: *.2 P5.2 U2.4 | length 1682
  Top Layer w10: P5.2 23734.02,2925.98 *.2
  Bottom Layer w10: P5.2 23390,3270 23390,3360 23723,3693 23723,3970.56 23630.56,4063 23630,4063 U2.4
PA7: *.3 P5.3 R17.2 R18.2 | length 3753.9
  Top Layer w10: v1(23575.94,5138.94) 23535,5098 23535,4228 ; *.3 23665.51,2894.49 P5.3 23360,3200 23360,4053 23535,4228 ; v1(24435,4238) 24345,4148 23615,4148 23535,4228
  Bottom Layer w10: v1(23575.94,5138.94) R17.2 ; v1(24435,4238) R18.2
PB0: *.4 P5.4 | length 455.3
  Top Layer w10: P5.4 23470,3000 23607.01,2862.99 *.4
PB1: *.5 P5.5 | length 426.9
  Top Layer w10: P5.5 23510,2900 23578.5,2831.5 *.5
PB2: *.6 P1.2 P5.6 R41.2 | length 8411.4
  Top Layer w10: R41.2@23330,2805 23330,5485 23400,5555 28135,5555 28195,5495 28195,5345 28215,5325 28338.15,5325 P1.2 ; R41.2@23350,2800 P5.6 *.6
PB3: *.7 P5.7 | length 426.9
  Top Layer w10: P5.7 23510,2700 23578.5,2768.5 *.7
PC0: *.10 P5.10 | length 512
  Top Layer w10: P5.10 23734.02,2674.02 *.10
PC1: *.11 P5.11 | length 555.4
  Top Layer w10: P5.11 23460,2325.51 23777.01,2642.52 *.11
PC2: *.12 P6.1 | length 558
  Top Layer w10: P6.1 23610,2180 23922.52,2492.52 *.12
PC3: *.13 P6.2 | length 512
  Top Layer w10: P6.2 23954.02,2454.02 *.13
PC4: *.14 P6.3 | length 483.7
  Top Layer w10: P6.3 23985.51,2385.51 *.14
PC5: *.15 P6.4 | length 455.3
  Top Layer w10: P6.4 23880,2190 24017.01,2327.01 *.15
PC6: *.16 P6.5 | length 426.9
  Top Layer w10: P6.5 23980,2230 24048.5,2298.5 *.16
PC7: *.17 P6.6 | length 398.5
  Top Layer w10: P6.6 *.17
PD0: *.20 P6.9 R31.1 TP1.1 | length 983.7
  Top Layer w10: *.20 24174.49,2385.51 P6.9 TP1.1@24380,1850 ; R31.1 TP1.1@24350,1820
PD1: *.21 P6.10 | length 512
  Top Layer w10: *.21 24205.98,2454.02 P6.10
PD2: *.22 H1.3 P6.11 | length 1111.8
  Top Layer w10: *.22 24237.48,2497.01 24554.49,2180 P6.11 ; P6.11@24590,2180 P6.11 ; H1.3@25085,2140 25055,2110 24650,2110 P6.11
PD3: *.23 H1.5 P7.11 | length 897.7
  Top Layer w10: *.23 24387.48,2642.52 24700,2330 P7.11 ; P7.11@24705,2300 24755,2250 24925,2250 H1.5@24995,2180
PD4: *.24 P7.10 R39.2 R40.2 | length 752
  Top Layer w10: *.24 24425.98,2674.02 P7.10 R39.2@24940,2400
PD5: *.25 P7.9 R38.1 | length 728.7
  Top Layer w10: *.25 24494.49,2705.51 P7.9 R38.1@24945,2500
PD6: *.26 P7.8 R34.1 | length 690.3
  Top Layer w10: *.26 24552.99,2737.01 P7.8@24690,2600 ; P7.8 R34.1@24945,2600
PD7: *.27 P7.7 R35.2 R36.2 | length 860.2
  Top Layer w10: *.27 24581.5,2768.5 24650,2700 P7.7 24920,2700 24940,2720 R36.2@24940,2905
PDI_CLK: *.35 P4.10 P11.5 P12.2 | length 2042.6
  Top Layer w10: *.35 24205.98,3145.98 P4.10 ; P11.5 25020,3855 25435,3855 P12.2@25745,4165
  Bottom Layer w10: P4.10@24490,3430 24685,3625 24800,3625 24822.5,3647.5
PDI_DATA: *.34 P4.11 P11.1 | length 839.2
  Top Layer w10: *.34 24237.48,3107.48 P4.11@24565,3435
  Bottom Layer w10: P4.11 24615,3385 24760,3385 P11.1@24827.5,3452.5
PE0: *.28 P7.6 Q5.1 R30.1 | length 5108.8
  Top Layer w10: *.28 P7.6 ; P7.6@24710,2800 P7.6 ; R30.1@28185,1825 28050,1825 27990,1765 27271.49,1765 27258.62,1777.87 27231.38,1777.87 27218.51,1765 25990,1765 25257.13,2497.87 25257.13,3082.87 25175.75,3164.25 24999.25,3164.25 24917.13,3082.13 24917.13,2997.13 24720,2800 P7.6 ; R30.1@28195,1834.02 Q5.1@28195,1890.79
PE1: *.29 P7.5 Q6.1 R29.2 | length 4247.6
  Top Layer w10: *.29 24581.5,2831.5 24650,2900 P7.5 24982.13,3182.13 25187.87,3182.13 25335,3035 25335,2540 26060,1815 27218.51,1815 27231.38,1802.13 27258.62,1802.13 27271.49,1815 27295,1815 ; 27292.87,1815 27295,1815 ; R29.2@27485,1815 27295,1815 ; R29.2@27497.6,1827.6 Q6.1@27497.6,1877.4
PE2: *.32 P7.2 Q4.1 R3.2 | length 4976.4
  Top Layer w10: *.32 24425.98,2925.98 P7.2 25230,3200 v1(25595,3565) ; v1(25595,3655) 26385,3655 26905,4175 26905,4565.28 27212.6,4872.87 28037.13,4872.87 R3.2@28100,4810 ; Q4.1@28109.06,4735.94 R3.2
  Bottom Layer w10: v1(25595,3565) v1(25595,3655)
PE3: *.33 P7.1 Q3.1 R26.1 | length 4186
  Top Layer w10: *.33 24382.99,2957.48 P7.1@24700,3274.49 ; P7.1@24707.87,3292.13 P7.1 24930,3300 25012.13,3217.87 25198.15,3217.87 25580.28,3600 26385.28,3600 26945,4159.72 26945,4554.72 27095.28,4705 27335,4705 Q3.1@27380,4750 ; Q3.1@27395,4755 R26.1
PR0: *.36 P4.9 | length 483.7
  Top Layer w10: *.36 24174.49,3214.49 P4.9
PR1: *.37 P4.8 | length 445.3
  Top Layer w10: *.37 24142.99,3272.99 P4.8@24280,3410
R\E\S\E\T\: C9.1 P12.1 R6.1 S1.1 S1.2 U1.1 | length 807.5
  Top Layer w10: P12.1@25850,4195 25782.6,4262.4 25782.6,4315.6 U1.1 ; S1.1@25860,4070 P12.1 ; R6.1@26170,4405 26170,4245 26224.13,4190.87 S1.2 ; R6.1@26170,4420 C9.1
V_3.3: *.9 *.19 *.31 C2.2 C3.2 C4.2 C8.1 C21.2 C22.2 C23.2 L1.1 L7.2 P5.9 P6.8 P7.3 P11.2 R6.2 R32.1 R41.1 R42.2 R43.2 U1.2 U2.3 U2.5 | length 3935.5
  Top Layer w10: P5.9 23665.51,2705.51 *.9 23940.08,2705.51 v1@23960,2695.59 ; v1(24160,2677.09) 24142.99,2660.08 *.19 24142.99,2317.01 P6.8 ; R32.1 24250,1910 24280,1940 P6.8@24280,2170 ; v1(24204.41,2910) 24219.92,2894.49 *.31 24494.49,2894.49 P7.3 ; C21.2@24880,4653 L7.2
  Bottom Layer w10: v1(23580,4063) U2.5 ; v1(23680,4063) U2.3 ; C2.2@23894.65,2690 v1(23960,2690) 23960,2700 23970,2690 24045,2690 24059.02,2704.02 L1.1@24059.02,2753.02 ; L1.1@24069,2763 24157.4,2763 ; C3.2 v1(24160,2677.09) 24160,2865.59 v1(24204.41,2910) C4.2 ; v1(25560,3780) v1(25560,3850) ; R43.2@26255,2129.06 26460.94,2129.06 v1@26540,2050 ; v1@26470,3805 v1(26555,3720) ; v1@26540,2045 26619.06,2124.06 R42.2@26860,2124.06
  other v1: 26545,2055 26465,3810
V_5: C16.2 C17.2 C18.2 H1.2 L4.2 Q1.3 Q2.2 R10.2 R11.2 R12.2 R13.2 R14.2 R15.2 R16.2 TP11.1 U2.16 | length 8676.5
  Top Layer w10: v1(24610,4413) 24610,4768 24585,4793 24585,5093 v1(24500,5178) 24572,5250 25660,5250 25750,5160 25750,4850 25857.94,4742.06 C17.2 ; v1@25019.5,3124.5 24970,3075 24970,2370 25150.35,2189.65 25150.35,2114.65 H1.2 ; v1(25025,3255) 25028,3255 25029,3256 25031,3256 25025,3262 25025,3705 25135,3815 26070,3815 26280,4025 v1@26280,4474
  Top Layer w14: C17.2@25990,4743 C16.2@26050,4743 ; C16.2@26070,4753 L4.2 ; C16.2@26095,4743 26230,4743 26275,4698 26275,4598
  Bottom Layer w10: Q1.3 23849.21,5093.79 23869.06,5073.94 R15.2 R14.2 R12.2 R13.2 24395.94,5073.94 v1(24500,5178) ; U2.16 23780,4343 23785,4338 R10.2@23845.94,4338 ; R10.2 23950.06,4337.06 23965.06,4352.06 R16.2 R11.2 24292.76,4352.06 ; Q2.2 24292.76,4352.06 ; v1(24610,4413) 24353.7,4413 24292.76,4352.06 ; v1(25025,3130) v1@25025,3249
  Bottom Layer w20: v1(26275,4483) v1@26275,4570
  other v1: 26275,4575
V_BATT: *1.4 *2.4 *3.4 *4.4 C14.2 C19.2 D1.2 D2.2 D5.2 D6.2 H3.1 H3.2 pad.3@27140,5255 R1.2 R2.1 R5.2 R8.2 R27.2 R28.1 TP36.1 VR_3.3.1 VR_5.1 | length 2322.9
  Top Layer w10: VR_3.3.1 25770.94,4619.06 25857,4533 26620,4533 26653.86,4566.86 VR_5.1@26653.86,4688 ; VR_5.1@26665.24,4713.24 C14.2 26978.24,4713.24 27055.24,4790.24 27055.24,5132.62 27055,5132.86 27055,5250 27061,5256 pad.3@27129,5256
  Top Layer w30: D6.2@27705,3010 D6.2
V_CHARGER: D10.1 D11.2 P1.3 TP31.1
pads on no net: H1.1 H1.7 H1.9 P1. P11.3 P11.4 U3.2

## Polygon pours and split planes (outlines as drawn)
GND on Bottom Layer "GND Plane" (solid, shelved): 23280,1670 23280,4320 27354.21,4320 27370,1670
V_CHARGER on Top Layer "Charger Voltage Plane" (solid, pour order 1000): 27550,5125 27550,5590 28740,5590 28740,5125
V_BATT on Top Layer "Motor Voltage Plane" (solid, pour order 1002): 27100,5590 27100,4875 28520,4875 28520,4565 26975,4565 26975,3385 27075,3330 27263.29,3366.7 27175.02,2998.04 27175,2465 26985,2316.18 26985,2050 28740,2050 28740,5115 27535,5115 27535,5590
no net on Top Layer "Top Layer-No Net" (solid, pour order 1000): 26151.06,3225.43 26127.44,3339.61 26318.39,3457.72 26784.92,3457.72 26989.65,3347.48 26929.61,3224.45 26540.83,3059.09
no net on Top Layer "Top Layer-No Net" (solid, pour order 1003): 26459.13,2491.18 26624.49,2491.18 26624.49,2820.91 26648.11,3068.94 26541.81,2993.15 26441.42,3066.97 26459.13,2819.92
no net on Top Layer "Top Layer-No Net" (solid, pour order 1004): 26394.17,2134.88 26721.93,2134.88 26654.02,2289.41 26439.45,2289.41
no net on Top Layer "Top Layer-No Net" (solid, pour order 1006): 25962.99,3012.78 25885.31,3330.75 26085.55,3281.53 26102.58,3184.1 26402.18,3056.45 26419.76,2813.03 26169.71,2863.23
no net on Top Layer "Top Layer-No Net" (solid, pour order 1007): 27155.03,3014.74 27232.71,3332.72 27032.47,3283.49 27015.44,3186.07 26715.84,3058.42 26698.26,2815 26948.31,2865.2
V_3.3 on Top Layer "Voltage Plane" (solid, pour order 1001): 23300,5590 23295,5585 23295,1685 23300,1680 28730,1680 28740,1690 28740,2040 26965,2040 26965,2294.67 26740.41,2110 26375,2110 25930,2466 25930,3046.25 25853.81,3365.28 26060,3325 26306.31,3480 26786.58,3480 26965,3385.83 26965,4575 28510,4575 28510,4865 27090,4865 27090,5590
NetD14_1 on Top Layer "Top Layer-No Net" (solid, pour order 1005): 27155,2475 27154.02,2959.68 26990.63,2847.48 26985.13,2804.95 26854.37,2722.97 26854.37,2235.28
GND on Top Layer "Top Layer-No Net" (solid, pour order 1002): 26357.76,2154.57 26407.95,2325.83 26679.61,2325.83 26759.33,2155.55 26814.45,2206.73 26814.45,2723.46 26667.8,2751.02 26667.8,2448.86 26419.76,2448.76 26419.76,2753.98 26292.8,2719.53 26293.78,2207.72
NetD15_1 on Top Layer "Top Layer-No Net" (solid, pour order 1001): 25959.76,2477.23 25960.12,2959.68 26123.5,2847.48 26129,2804.95 26259.76,2722.97 26259.76,2235.28
GND on Bottom Layer "GND" (solid, pour order 1001): 23295,5590 23300,1680 28740,1675 28740,2040 26965,2040 26965,4575 28510,4575 28510,4865 27090,4865 27090,5310 27805,5310 27805,5125 28740,5125 28740,5590
MOTOR_GND on Bottom Layer "MOTOR_GND" (solid, pour order 1000): 27100.2,5300 27795,5300 27795,5115 28740,5115 28740,2050 26975.46,2050 26975.46,4565.48 28520.46,4564.48 28520.46,4875 27100.49,4875

## Other copper
Top Layer:
  pour cut-out: 26363.66,2855.35 26352.83,2914.41 26012.28,3078.78 26026.06,3022.68
  pour cut-out: 26356.77,2952.3 26345.94,3011.36 26005.39,3175.73 26019.17,3119.63
  pour cut-out: 26757.36,2956.24 26768.19,3015.3 27108.74,3179.67 27094.96,3123.56
  pour cut-out: 26750.47,2859.29 26761.3,2918.35 27101.85,3082.72 27088.07,3026.61
  pour cut-out: 23565,5090 23565,4335 24555,4335 24555,5090
  pour cut-out: 26345,3340 26540,3230 26765,3340
Bottom Layer:
  region net Net*1_6: 27100,4360 27100,3475 27645,3475 27645,4360
  region net Net*2_6: 28500,4360 28500,3495 27955,3495 27955,4360
  region net Net*3_6: 28490,2260 28490,3130 27945,3130 27945,2260
  region net Net*4_6: 27100,2260 27100,3145 27645,3145 27645,2260

## Silkscreen, mask and mechanical layers (free items; w line width, h text height)
Top Overlay:
  lines w10: 23285,1665 28750,1665 28750,5600 23285,5600 23285,1665
  text "Group 9 Motor Board" at 23415,5435 h60

## Text inside footprints (layer, text, board x,y; h text height)
H1: Top Overlay "2" at 25190,1940 h59.06; Top Overlay "1" at 25195,2215 h59.06; Top Overlay "10" at 24760,1945 h59.06; Top Overlay "9" at 24824.69,2266.3 h59.06 r180
P11: Top Overlay "6" at 24760,3735 h50 r90; Top Overlay "5" at 24860,3735 h50 r90; Top Overlay "2" at 24760,3375 h50 r90; Top Overlay "1" at 24860,3395 h50 r90